# Altium PCB valve driver.PcbDoc
Units mil, origin at the board's own origin, x right, y up, seen from the top; angles counter-clockwise.
Board outline 866.14 x 787.4 mil, 2 copper layers (Top Layer, Bottom Layer), stack 61.811 mil thick; 11 components, 8 nets, 40 pads, 21 vias.
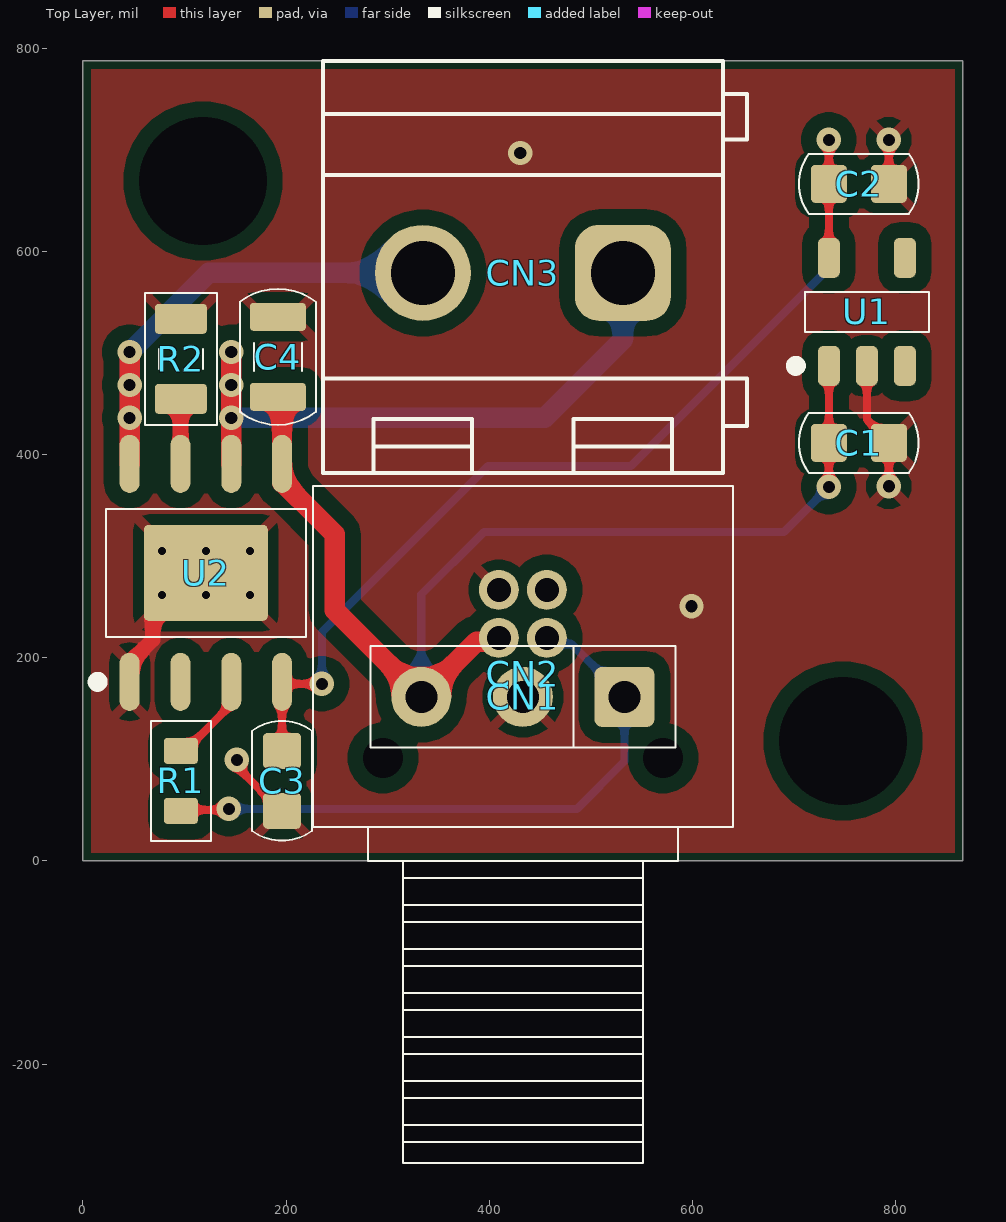
[diagram p0: Top Layer view]
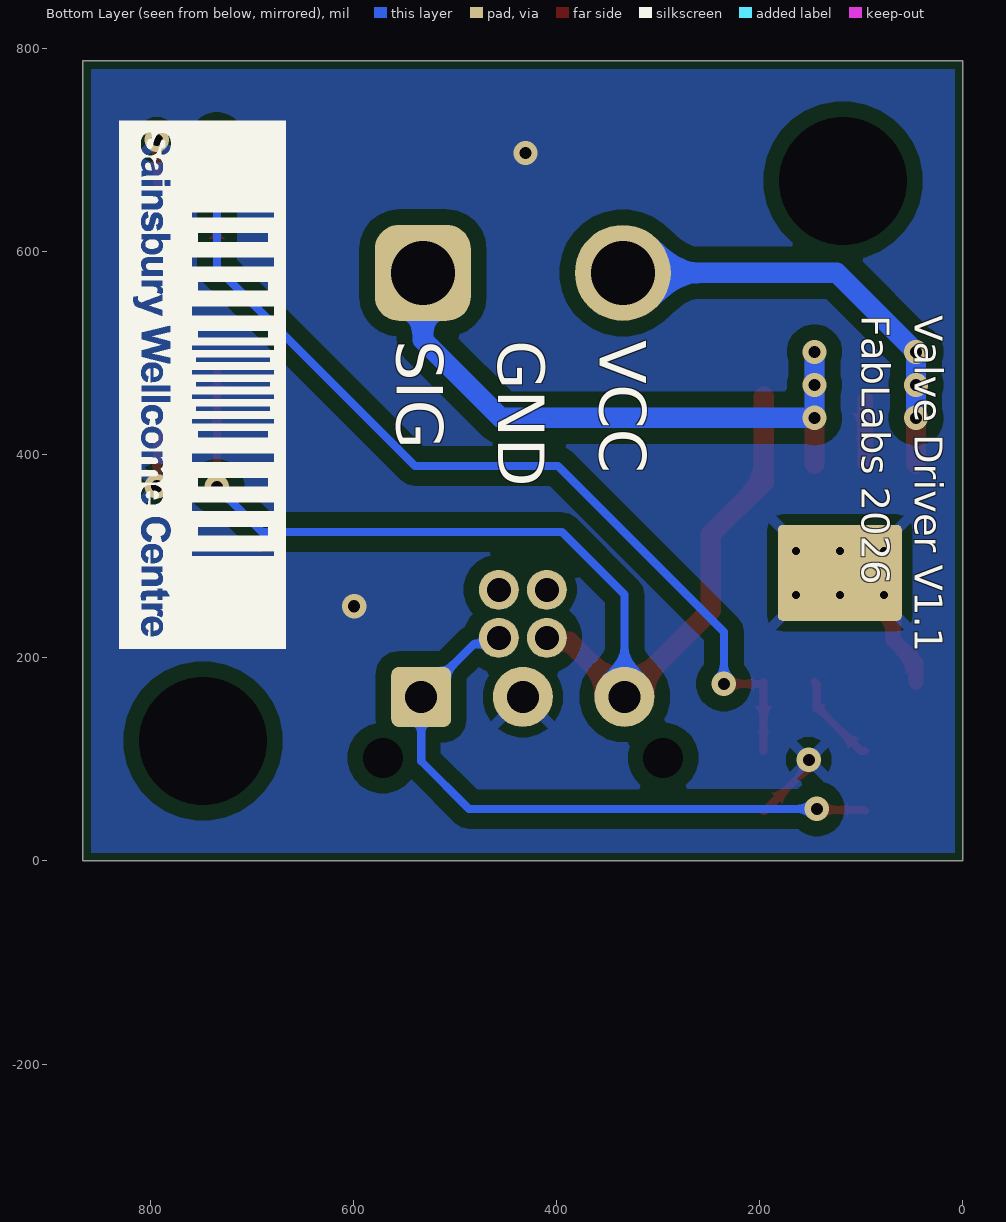
[diagram p1: Bottom Layer view, seen from below]
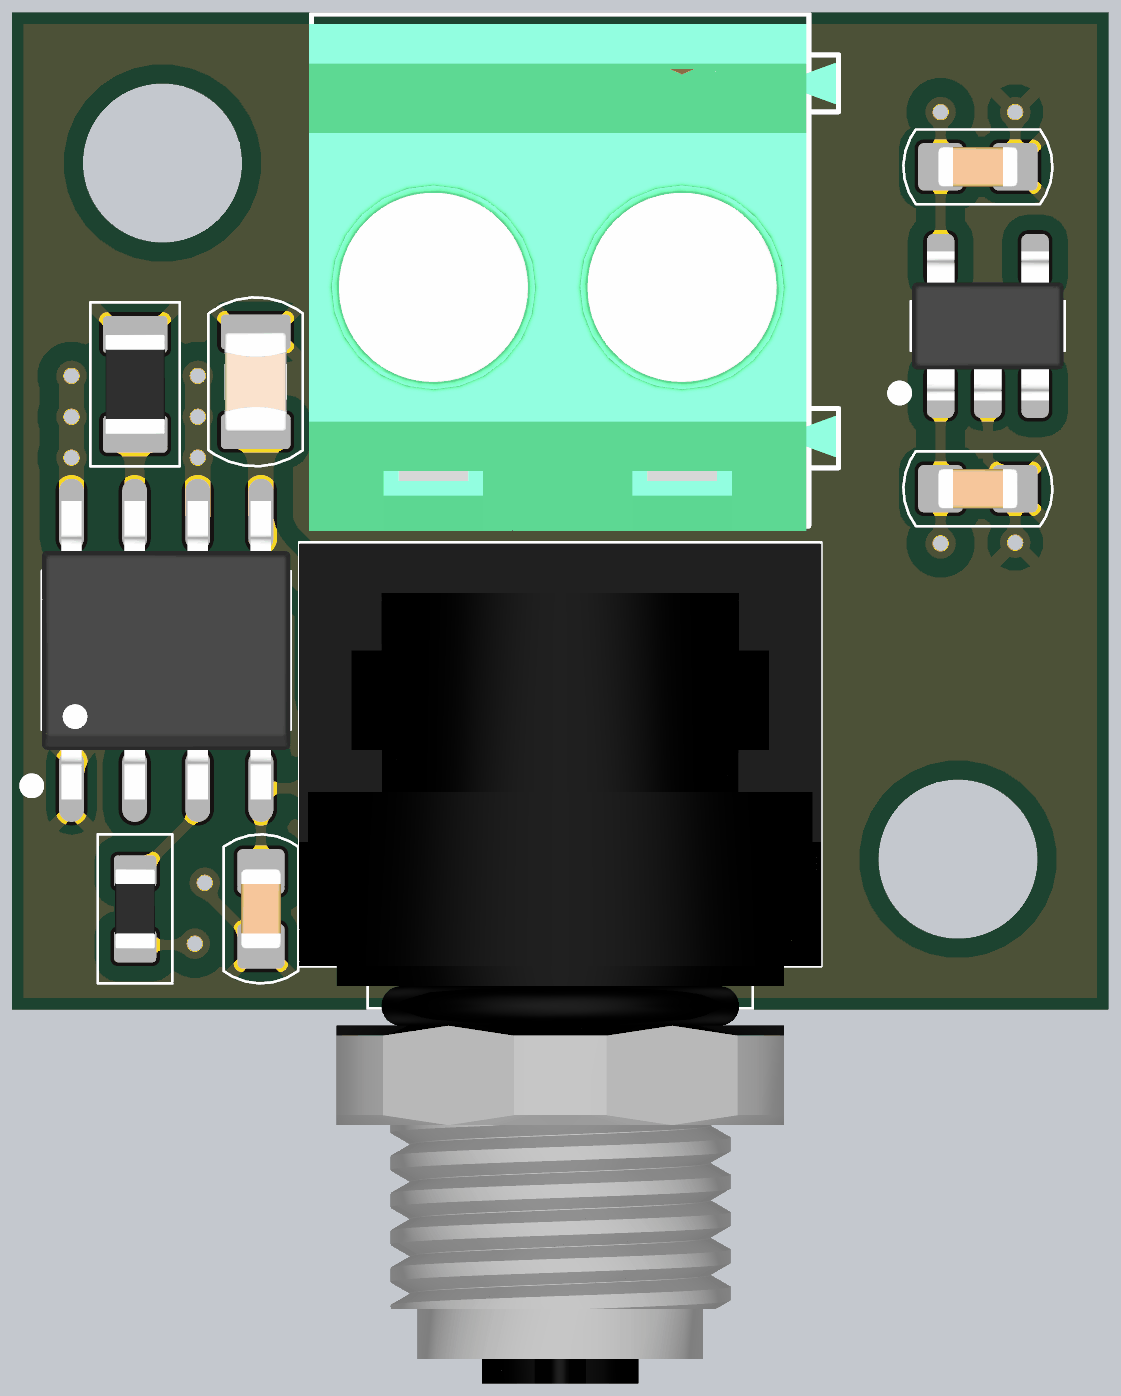
[diagram p2: 3D render of the assembled board from above, using the file's embedded part models]

## Layer stack, top to bottom
Top Solder: solder mask 0.5, Solder Resist, Dk 3.8
Top Layer: signal copper 1.378
Dielectric: core 59.0551, FR-4, Dk 4.5
Bottom Layer: signal copper 1.378
Bottom Solder: solder mask 0.5, Solder Resist, Dk 3.8

## Board outline
0,0 0,787.4 866.14,787.4 866.14,0

## Design rules (kind name [scope] priority, off if disabled: settings)
BoardOutlineClearance [(OnLayer('Bottom Overlay') OR OnLayer('Top Overlay'))] p1: gap=0 ignorepadtopadclearanceinfootprint=FALSE
BoardOutlineClearance BoardOutlineClearance_1 [All] p2: gap=7.87 ignorepadtopadclearanceinfootprint=FALSE
Clearance Clearance_Polygon [InPolygon] p1: gap=15 ignorepadtopadclearanceinfootprint=FALSE
Clearance [All] p2: gap=5 ignorepadtopadclearanceinfootprint=FALSE except(8: Arc-Hole Track-Hole Via-Hole Fill-Hole Poly-Hole Region-Hole Text-Hole)
ComponentClearance [All] p1: gap=3.5 collisioncheckmode=3 verticalgap=3.5 showdistances=TRUE
DiffPairsRouting JLCPCB_6L_90Ohm [InDifferentialPairClass('USB')] p1: maxlimit=5 minlimit=5 mostfreqgap=5 toplayer_minwidth=6.78 toplayer_maxwidth=6.78 toplayer_prefwidth=6.78 bottomlayer_minwidth=6.78 bottomlayer_maxwidth=6.78 bottomlayer_prefwidth=6.78 maxuncoupledlength=500
DiffPairsRouting JLCPCB_6L_120Ohm [InDifferentialPairClass('RS485')] p2: maxlimit=12 minlimit=5 mostfreqgap=12 toplayer_minwidth=6.28 toplayer_maxwidth=6.28 toplayer_prefwidth=6.28 bottomlayer_minwidth=6.28 bottomlayer_maxwidth=6.28 bottomlayer_prefwidth=6.28 maxuncoupledlength=500
Height [All] p1: minheight=0 maxheight=71497.94 prefheight=500
HoleSize [All] p1: absolutevalues=TRUE maxlimit=248.03 minlimit=7.87 maxpercent=80.000 minpercent=20.000
HoleToHoleClearance [All] p1: gap=9.84 allowstackedmicrovias=FALSE
MinimumAnnularRing [All] p1: minimumring=3
MinimumSolderMaskSliver [All] p1: minsoldermaskwidth=0
PlaneClearance [All] p1: clearance=3.5
PlaneConnect PlaneConnectPowerPads [InPadClass('PowerPads')] p1: planeconnectstyle=Direct reliefexpansion=20 reliefentries=4 reliefconductorwidth=10 reliefairgap=10
PlaneConnect [All] p2: pad.planeconnectstyle=Relief pad.reliefexpansion=11.81 pad.reliefentries=4 pad.reliefconductorwidth=3.5 pad.reliefairgap=3.5 via.planeconnectstyle=Relief via.reliefexpansion=11.81 via.reliefentries=4 via.reliefconductorwidth=5 via.reliefairgap=5
PolygonConnect PolygonConnectPowerPads [(InNet('GND') OR InNet('3V3') OR InNet('3V3A'))] p1: connectstyle=Relief reliefconductorwidth=10 reliefentries=4 polygonreliefangle="45 Angle" airgapwidth=10
PolygonConnect [All] p2: connectstyle=Direct reliefconductorwidth=3.5 reliefentries=4 polygonreliefangle="90 Angle" airgapwidth=3.5
RoutingVias [All] p1: holewidth=7.87 width=17.72 viastyle="Through Hole" minholewidth=7.87 minwidth=17.72 maxholewidth=248.03 maxwidth=257.87
SMDNeckDown [All] p1 off: percent=50.000
SilkToSilkClearance [All] p1: silktosilkclearance=0
SilkToSolderMaskClearance [IsPad] p1 off: minsilkscreentomaskgap=3.5 clearancetoexposedcopper=TRUE
SolderMaskExpansion [All] p1: expansion=2.95 istentingtop=FALSE
SupplyNets "Schematic Supply Nets_1" [InNet('3V3')] p1: voltage=0.000
SupplyNets "Schematic Supply Nets" [InNet('VCC')] p2: voltage=0.000
SupplyNets "Schematic Supply Nets_4" [InNet('GND')] p3: voltage=0.000
Width [All] p1: maxlimit=71497.94 minlimit=3.5 preferedwidth=3.5
20 further rules are at their usual default settings.

## Components (designator, comment, footprint, x,y, rotation, side; value= is the part's Value field where it differs from the comment)
C1 "C0603-100nF-50V" CAP_CHIP_0603 763.78,411.42 r180 top value=100nF
C2 "C0603-100nF-50V" CAP_CHIP_0603 763.78,666.34 r180 top value=100nF
C3 "C0603-100nF-50V" CAP_CHIP_0603 196.06,78.74 r90 top value=100nF
C4 "C0805-22uF-25V" CAP_CHIP_0805 191.93,496.06 r270 top value=22µF
CN1 "PIN HEADER" PIN_2.54_90_1X3P 433.07,161.42 r180 top
CN2 "CTRL_IN" 853-004-213R00Y 433.07,243.11 r180 top
CN3 "VALVE/MOTOR" TH-5.00-1X2P 433.07,578.74 r180 top
R1 "R0603-1K" RES_CHIP_0603 96.46,78.74 r90 top value=1k
R2 "R0805-0R22" RES_CHIP_0805 96.46,494.09 r270 top value=220mR
U1 "TPS70933" SOT23-5 771.65,540.35 r0 top
U2 "TB67H450FNG" SOIC8_EP_TI 121.06,283.46 r0 top

## Footprints (in the part's own frame and the unit in brackets; to place one, negate y for a bottom-side part, rotate by r counter-clockwise, add the part's x,y. Pads: shape width x height; smd on the part's side, far side on the other; paste and mask are expansions set on the pad)
853-004-213R00Y [mm] "M5 FEMALE - RIGHT ANGLE - 4 POSITION"
  round 0.6 hole 1 unplated: 0(-3.5,3.6) 0(3.5,3.6)
  round 1 hole 0.6: 1(0.6,-0.6) 2(-0.6,-0.6) 3(-0.6,0.6) 4(0.6,0.6)
  silkscreen extent -5.25,-3.2 5.25,13.72, body extent -5.25,-3.18 5.25,13.72, height 10.54
CAP_CHIP_0603 [mm]
  rrect25% 0.9x0.95 smd: 1(-0.75,0) 2(0.75,0)
  silkscreen extent -1.5,-0.75 1.5,0.75, body extent -0.8,-0.4 0.8,0.4, height 0.8
CAP_CHIP_0805 [mm] "Chip Capacitor, 2-Leads, Body 2.00x1.25mm, IPC Medium Density"
  rrect25% 0.7x1.4 smd: 1(-1,0) 2(1,0)
  silkscreen extent -1.7,-0.95 1.7,0.95, body extent -1,-0.63 1,0.63, height 1.26
PIN_2.54_90_1X3P [mm] "PinHeader 1x3 TH Pitch 2.54mm"
  rrect25% 1.5x1.5 hole 0.8: 1(-2.54,0)
  round 1.5 hole 0.8: 2(0,0) 3(2.54,0)
  silkscreen extent -3.81,-1.27 3.81,1.27
RES_CHIP_0603 [mm]
  rrect25% 0.65x0.85 smd: 1(-0.75,0) 2(0.75,0)
  silkscreen extent -1.5,-0.75 1.5,0.75, body extent -0.8,-0.4 0.8,0.4, height 0.45
RES_CHIP_0805 [mm]
  rrect25% 0.75x1.3 smd: 1(-1,0) 2(1,0)
  silkscreen extent -1.65,-0.9 1.65,0.9, body extent -1,-0.6 1,0.6, height 0.45
SOIC8_EP_TI [mm] "SOP, 8-Leads, Body 4.90x3.90mm, Pitch 1.27mm, Thermal Pad 3.10x2.40mm, IPC Medium Density"
  rrect10% 3.1x2.4 smd: 0(0,0)
  rrect10% 3.1x2.4 smd far side paste-2539.97 mask+0.102: 0(0,0)
  oval 0.5x1.45 smd: 1(-1.905,-2.725) 2(-0.635,-2.725) 3(0.635,-2.725) 4(1.905,-2.725) 5(1.905,2.725) 6(0.635,2.725) 7(-0.635,2.725) 8(-1.905,2.725)
  silkscreen extent -2.83,-2.85 2.5,1.6, body extent -2.5,-3 2.5,3, height 1.7
SOT23-5 [mm] "SOT23, 5-Leads, Body 2.90x2.80mm, Pitch 0.95mm, IPC Medium Density"
  rrect50% 0.55x1 smd: 1(-0.95,-1.35) 2(0,-1.35) 3(0.95,-1.35) 4(0.95,1.35) 5(-0.95,1.35)
  silkscreen extent -1.9,-1.47 1.55,0.5, body extent -1.53,-1.5 1.53,1.5, height 1.45
TH-5.00-1X2P [mm]
  rrect50% 2.4x2.4 hole 1.6 paste-2539.97 mask+0.051: 1(-2.5,0)
  round 2.4 hole 1.6 paste-2539.97 mask+0.051: 2(2.5,0)
  silkscreen extent -5.6,-5.3 5,5, body extent -5.55,-5.1 5.05,5.1, height 14.05

## Part data
C1 C2 C3: library part CMP-611-0027-24, "0603 Multilayer Ceramic Capacitors MLCC", Capacitor Type=Ceramic, Case/Package=0603, Dielectric=X7R, LCSC Part N.=C14663, PartNumber=CC0603KRX7R9BB104, Tolerance=10%, Voltage Rating=50V, Mount=SMD, Pick&PlaceFootprint=C0603, RoHS=Yes
C4: library part CMP-611-0000-9, "0805 Multilayer Ceramic Capacitors MLCC", Capacitor Type=Ceramic, Case/Package=0805, Dielectric=X5R, LCSC Part N.=C45783, PartNumber=CL21A226MAQNNNE, Tolerance=20%, Voltage Rating=25V, Mount=SMD, Pick&PlaceFootprint=C0805, RoHS=Yes
CN1: library part CMP-00045-2, "Through Hole,Right Angle,P=2.54mm", LCSC Part N.=C492411, PartNumber=PZ254R-11-03P, Gender=Male, Mount="Through Hole", Number of Contacts=3, Number of Positions=3, Number of Rows=1, Orientation="Right Angle", Pitch=2.54mm
CN2: library part CMP-370-0028-8, "CONN PLUG FMALE 4POS GOLD SOLDER", Current Rating=1A, LCSC Part N.=C21080541, PartNumber=853-004-213R001, Voltage Rating=60V, Connector Type=Receptacle, Contact Plating=Gold, Fastening Type=Threaded, Number of Pins=4, Termination=Solder
CN3: library part CMP-00028-6, "1x2P 20A -40℃~+105℃ 250V Green 12~22 Direct Insert 5mm 2.5 1 2 Plugin,P=5mm Screw Terminal Blocks", LCSC Part N.=C8269, PartNumber=WJ128V-5.0-2P, Gender=Male, Mount="Thought Hole", Number of Contacts=2, Number of Positions=2, Number of Rows=1, Orientation=Straight, Pitch=5mm
R1: library part CMP-633-0013-26, "100mW Thick Film Resistors 75V ±100ppm/℃ ±1% 0603 Chip Resistor", Case/Package=0603, LCSC Part N.=C21190, Number of Resistors=1, PartNumber=0603WAF1001T5E, Power Rating=100mW, Tolerance=1%, Voltage Rating=75V, Mount="Surface Mount", Pick&PlaceFootprint=R0603
R2: library part CMP-633-0220-1, "Res Thick Film 0805 0.22 Ohm 1% 0.5W(1/2W) 0ppm/C to 100ppm/C Pad SMD T/R Automotive AEC-Q200", Case/Package=0805, LCSC Part N.=C6844934, Number of Resistors=1, PartNumber=ERJ-6DQFR22V, Power Rating=500mW, Tolerance=1%, Mount=SMD, Pick&PlaceFootprint=R0805
U1: library part CMP-970-0051-1, "LDO Regulator Pos 3.3V 0.15A 5-Pin SOT-23 T/R", Dropout Voltage=960mV, LCSC Part N.=C89347, Max Input Voltage=30V, Max Output current=150mA, Output Voltage=3.3V, PartNumber=TPS70933DBVR, Quiescent Current=1uA, Accuracy=2%, Line Regulation=0.1%, Load Regulation=0.6%, Output Noise=0.19mV, Output Type=Fixed, PSRR=80dB
U2: library part CMP-970-0052-3, "Brushed Motor Driver IC, 50V, 3.5A, SOP8 Package", LCSC Part N.=C545417, Max Output current=3.5A, Max Supply Voltage=44V, Min Supply Voltage=4.5V, PWM Freqency=400kHz, PartNumber=TB67H450FNG, Pick&PlaceFootprint=HSOP8, RDS(ON)=600mR

## Free pads (board coordinates)
  round 0 hole 125.98 unplated: 0(748.03,118.11) 1(118.11,669.29)

## Via types
v1: diameter 24, hole 12, Top Layer to Bottom Layer, tented both sides, 15 vias
v2: diameter 19.68, hole 7.87, Top Layer to Bottom Layer, tented bottom, 6 vias

## Nets (pads, with @x,y where several pads share a name; then routed paths per layer and width w, separated by ;. In a path a pad name is that pad's centre, name@x,y a point inside that pad or via, vN(x,y) a via of type N, cw(c..) or ccw(c..) an arc to the next point about the centre after c; other vN are vias at no path point)
3V3: C2.2 C3.2 U1.5 U2.4 | length 1047.8
  Top Layer w8: C3.2 U2.4 ; U2.4@196.06,174.21 v1(235.24,174.21) ; U1.5 C2.2 v1(734.25,709.65)
  Bottom Layer w8: v1(235.24,174.21) 235.24,225.39 398.62,388.78 539.37,388.78 734.25,583.66 v1(734.25,709.65)
GND: C1.1 C2.1 C3.1 C4.1 CN1.2 CN2.1 R2.1 U1.2 U2.0 U2.1 | length 339.3
  Top Layer w8: v1(151.57,99.41) 154.64,96.35 154.64,89.66 195.08,49.21 C3.1 ; U1.2 771.65,434.29 793.31,412.63 C1.1 ; v1(793.31,368.72) C1.1@793.31,412.03 ; C2.1 v1(793.31,709.65)
  Top Layer w15: U2.1 46.06,194.88 68.76,217.58 68.76,252.82 v2(77.76,261.81)
  other v1: 599.12,250.52 430.48,696.67
  other v2: 121.06,261.81 164.37,261.81 77.76,305.12 121.06,305.12 164.37,305.12
INPUT: CN1.1 CN2.3 R1.1 | length 620.7
  Top Layer w8: R1.1 97.44,50.2 142.72,50.2 v1(143.7,51.18)
  Bottom Layer w8: v1(143.7,51.18) 486.22,51.18 533.07,98.03 CN1.1 481,213.49 462.7,213.49 CN2.3
NetR1_2: R1.2 U2.3 | length 90.8
  Top Layer w8: R1.2 100.39,108.27 143.83,151.7 143.83,173.95 U2.3
NetR2_2: R2.2 U2.7 | length 64.1
  Top Layer w8: R2.2@96.06,454.33 R2.2
  Top Layer w15: U2.7 R2.2@96.06,454.33
OUTA: CN3.1 U2.6 | length 658
  Top Layer w20: U2.6 v1(146.06,436.02) v1(146.06,468.41) v1(146.06,500.79)
  Bottom Layer w20: v1(146.06,500.79) v1(146.06,436.02) 454.72,436.02 531.5,512.8 CN3.1
OUTB: CN3.2 U2.8 | length 495.7
  Top Layer w20: U2.8 v1(46.06,436.02) v1(46.06,468.41) v1(46.06,500.79)
  Bottom Layer w20: v1(46.06,436.02) v1(46.06,500.79) 124.02,578.74 CN3.2
VCC: C1.2 C4.2 CN1.3 CN2.4 U1.1 U2.5 | length 1118
  Top Layer w8: v1(734.25,368.11) C1.2 U1.1
  Top Layer w20: C4.2@195.87,456.69 195.96,456.59 195.96,390.85 U2.5 196.06,372.36 196.22,372.2 197.13,372.2 248.03,321.3 248.03,246.46 CN1.3 387.44,215.78 405.74,215.78 CN2.4
  Bottom Layer w8: CN1.3 333.07,262.2 394.68,323.82 689.96,323.82 v1(734.25,368.11)
pads on no net: CN2.0 CN2.2 U1.3 U1.4 U2.2

## Polygon pours and split planes (outlines as drawn)
GND on Top Layer "GND_L01_P003" (solid, remove dead copper, pour order 3): 0,0 0,787.4 866.14,787.4 866.14,0 483.27,0
GND on Bottom Layer "GND_L02_P004" (solid, remove dead copper, pour order 4): 0,0 0,787.4 866.14,787.4 866.14,0 483.27,0

## Silkscreen, mask and mechanical layers (free items; w line width, h text height)
Bottom Overlay:
  drawing of 8 lines, arcs and shapes, not listed
  text "Valve Driver V1.1" at 56.61,536.94 h47.24 r90
  text "FabLabs 2026" at 108.75,536.96 h47.24 r90
  text "VCC" at 372.44,512.29 h78.74 r90
  text "GND" at 472.44,512.29 h78.74 r90
  text "SIG" at 572.44,512.29 h78.74 r90
Board Shape:
  the board outline again, w1.97